# Altium PCB ongeki2.0_2021-10-12.pcbdoc
Units mil, origin at the board's own origin, x right, y up, seen from the top; angles counter-clockwise.
Board outline 4159.61 x 3372.2 mil, 2 copper layers (Top Layer, Bottom Layer); 1 components, 2 nets, 83 pads, 0 vias.
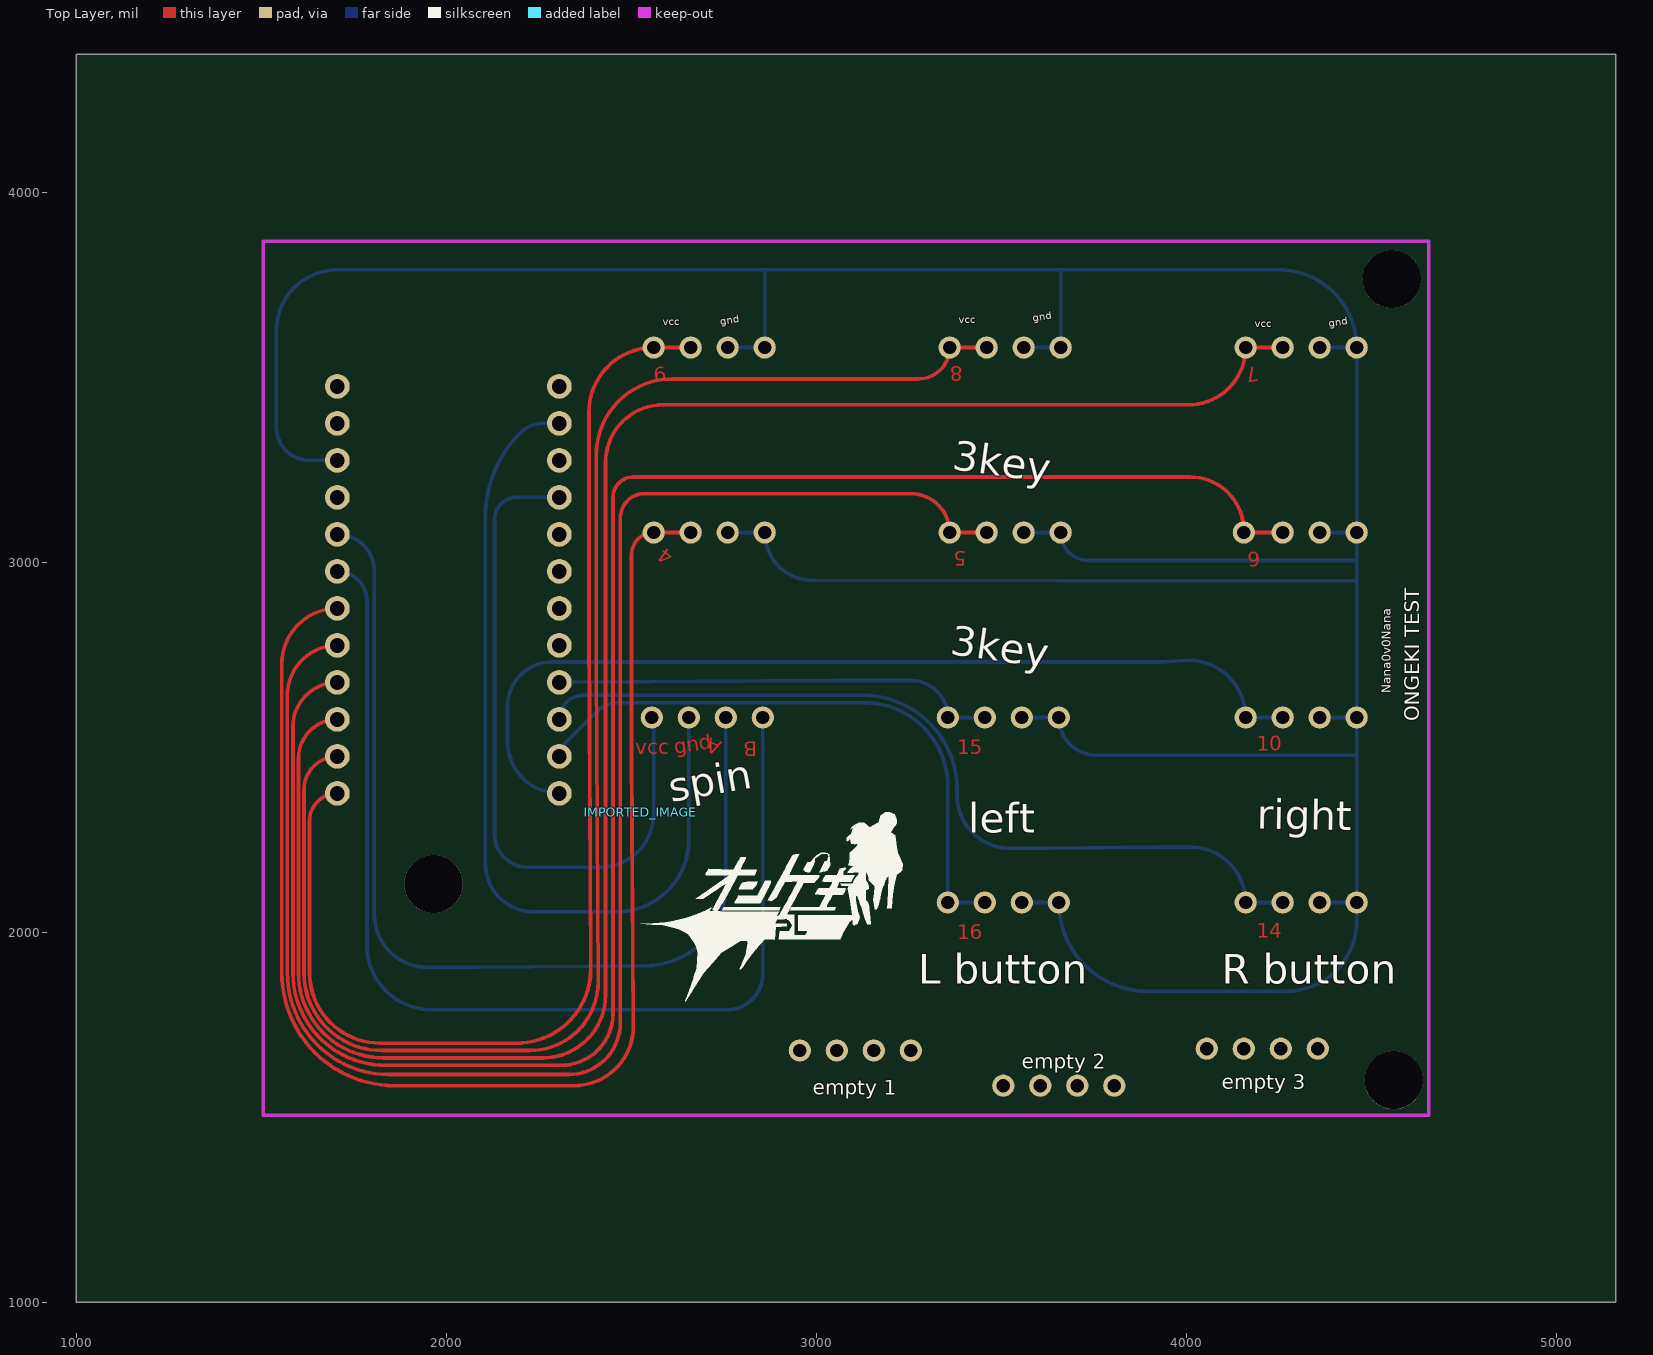
[diagram p0: Top Layer view]
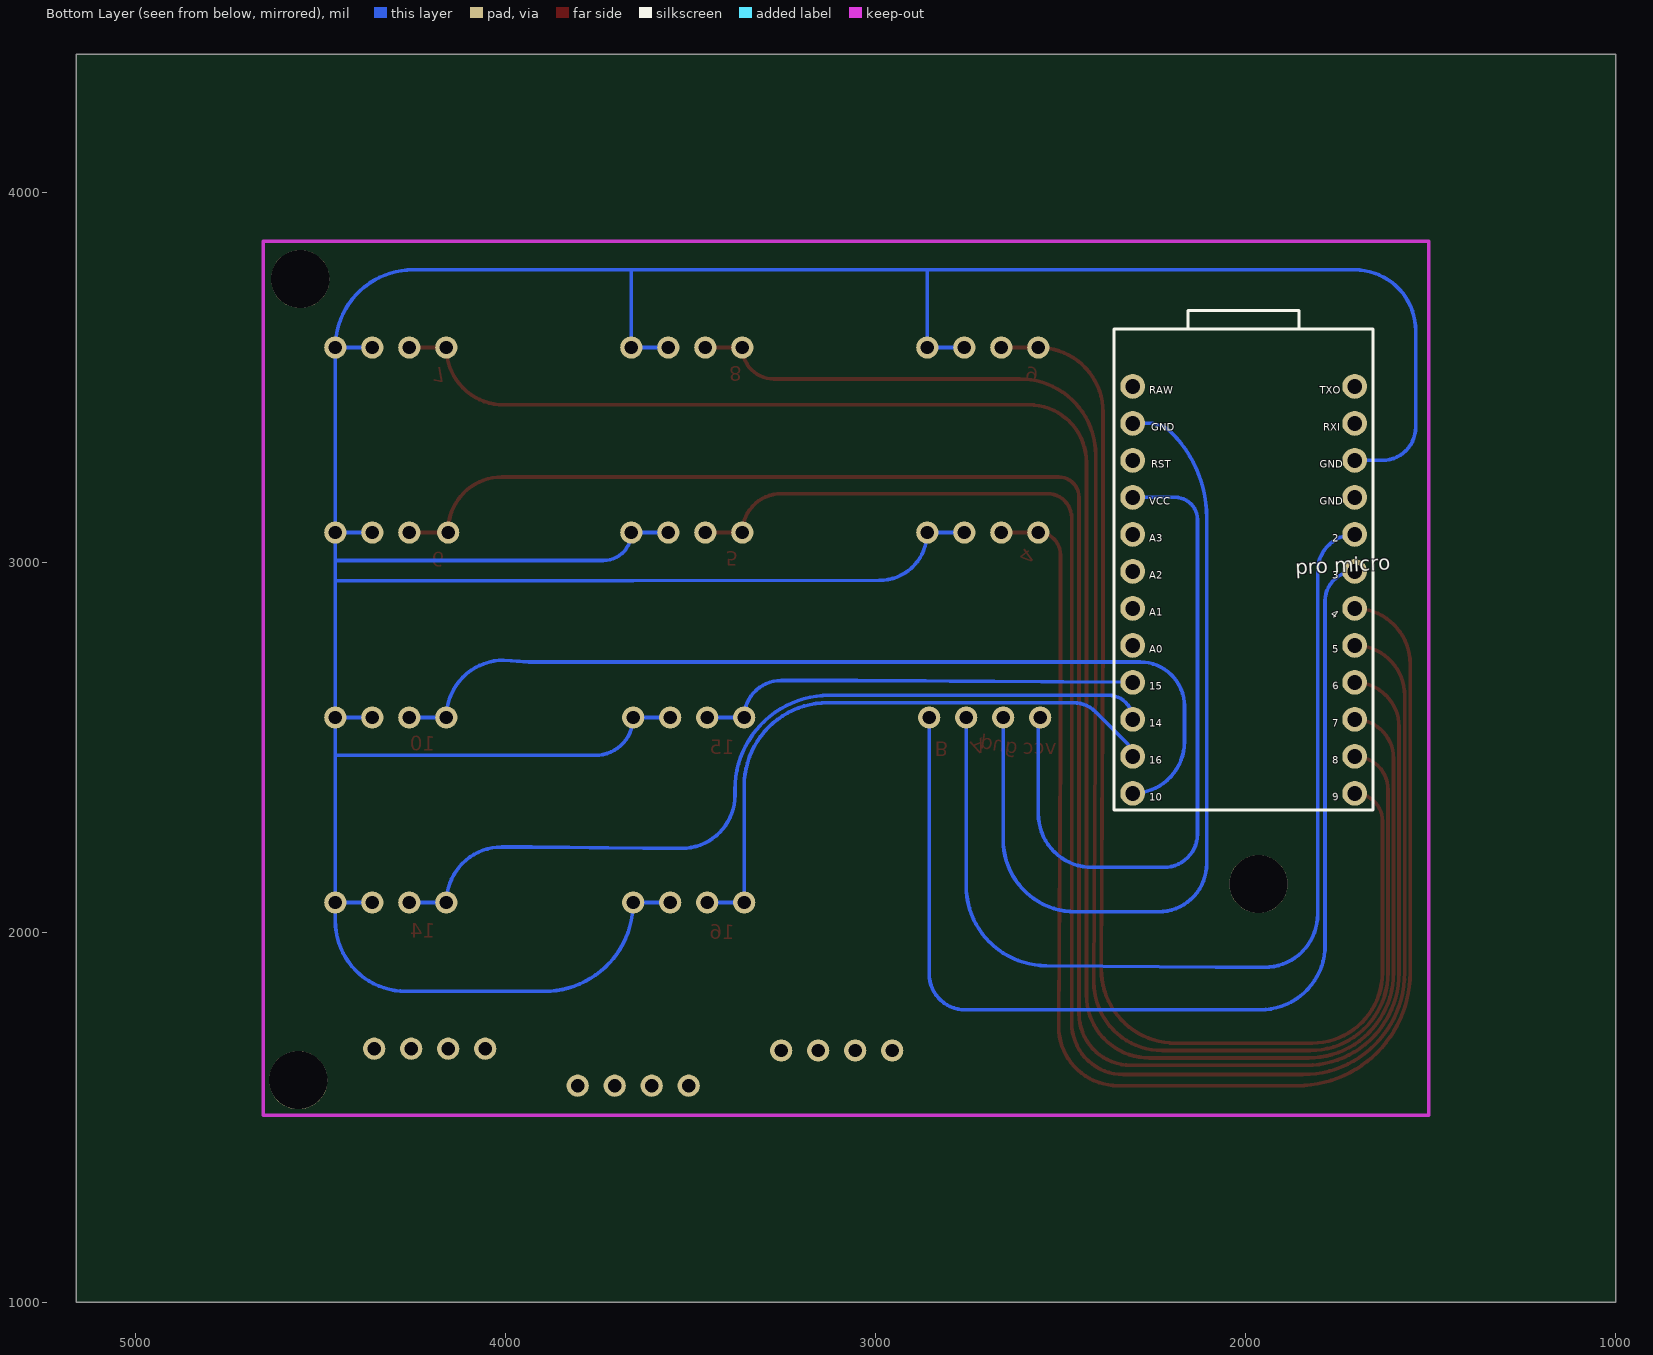
[diagram p1: Bottom Layer view, seen from below]

## Layer stack, top to bottom
Top Layer: signal copper (thickness not stored)
Dielectric: dielectric 12.6, FR-4, Dk 4.8
Bottom Layer: signal copper (thickness not stored)

## Board outline
5159.61,1000 1000,1000 1000,4372.2 5159.61,4372.2

## Components (designator, comment, footprint, x,y, rotation, side; value= is the part's Value field where it differs from the comment)
IMPORTED_IMAGE "IMPORTED_IMAGE" IMPORTED_IMAGE 2524.6,2324.54 r0 top

## Footprints (in the part's own frame and the unit in brackets; to place one, negate y for a bottom-side part, rotate by r counter-clockwise, add the part's x,y. Pads: shape width x height; smd on the part's side, far side on the other; paste and mask are expansions set on the pad)
IMPORTED_IMAGE [mil]
  silkscreen extent 0,-512 709,0

## Free pads (board coordinates)
  round 66.93 hole 40: 1(1705,2375.2) 2(1705,2475.2) 3(1705,2575.2) 4(1705,2675.2) 5(1705,2775.2) 6(1705,2875.2) 7(1705,2975.2) 8(1705,3075.2) 9(1705,3175.2) 10(1705,3275.2) 11(1705,3375.2) 12(1705,3475.2) 13(2305,3475.2) 14(2305,3375.2) 15(2305,3275.2) 16(2305,3175.2) 17(2305,3075.2) 18(2305,2975.2) 19(2305,2875.2) 20(2305,2775.2) 21(2305,2675.2) 22(2305,2575.2) 23(2305,2475.2) 24(2305,2375.2)
  round 60 hole 36: 25(2560,3080.2) 25(2560,3580.2) 25(3355,2080.2) 25(3355,2580.2) 26(2660,3080.2) 26(2660,3580.2) 26(3455,2080.2) 26(3455,2580.2) 27(2760,3080.2) 27(2760,3580.2) 27(3555,2080.2) 27(3555,2580.2) 28(2860,3080.2) 28(2860,3580.2) 28(3655,2080.2) 28(3655,2580.2) 31(2555,2580.2) 31(2955,1680.2) 31(3360,3080.2) 31(3360,3580.2) 31(3505,1585.2) 31(4055,1685.2) 32(2655,2580.2) 32(3055,1680.2) 32(3460,3080.2) 32(3460,3580.2) 32(3605,1585.2) 32(4155,1685.2) 33(2755,2580.2) 33(3155,1680.2) 33(3560,3080.2) 33(3560,3580.2) 33(3705,1585.2) 33(4255,1685.2) 34(2855,2580.2) 34(3255,1680.2) 34(3660,3080.2) 34(3660,3580.2) 34(3805,1585.2) 34(4355,1685.2) 35(4155,3080.2) 35(4160,2080.2) 35(4160,2580.2) 35(4160,3580.2) 36(4260,2080.2) 36(4260,2580.2) 36(4260,3080.2) 36(4260,3580.2) 37(4360,2080.2) 37(4360,2580.2) 37(4360,3080.2) 37(4360,3580.2) 38(4460,2080.2) 38(4460,2580.2) 38(4460,3080.2) 38(4460,3580.2)
  round 157.48 hole 157.48 unplated: ""(1965,2130.2) ""(4555,3765.2) ""(4560,1600.2)

## Nets (pads, with @x,y where several pads share a name; then routed paths per layer and width w, separated by ;. In a path a pad name is that pad's centre, name@x,y a point inside that pad or via, vN(x,y) a via of type N, cw(c..) or ccw(c..) an arc to the next point about the centre after c; other vN are vias at no path point)
S$1294: pad.1 pad.2 pad.3 pad.4 pad.5 pad.6 pad.7 pad.8 pad.10 pad.14 pad.16 pad.21 pad.22 pad.23 pad.24 pad.25 pad.26 pad.27 pad.28 pad.31 pad.32 pad.33 pad.34 pad.35 pad.36 pad.37 pad.38 | length 55355.4
  Top Layer w10: pad.8@1676.57,3075.2 pad.8 ; pad.1 ccw(c1705,2300.2) 1630,2300.2 1630,1890.2 ccw(c1820,1890.2) 1820,1700.2 2030,1700.2 2190,1700.2 ccw(c2190,1900.2) 2390,1900.2 2385,2830.2 2385,3405.2 cw(c2560,3405.2) 2560,3580.2 pad.26@2660,3580.2 ; pad.2 ccw(c1705,2385.2) 1615,2385.2 1615,1890.2 ccw(c1825,1890.2) 1825,1680.2 2030,1680.2 2225,1680.2 ccw(c2225,1865.2) 2410,1865.2 2405,2718.71 ; pad.3 ccw(c1705,2470.2) 1600,2470.2 1600,1890.2 ccw(c1830,1890.2) 1830,1660.2 2035,1660.2 2260,1660.2 ccw(c2260,1830.2) 2430,1830.2 2430,2595.2 2430,3270.2 cw(c2585,3270.2) 2585,3425.2 4005,3425.2 ccw(c4005,3580.2) 4160,3580.2 pad.36@4260,3580.2 ; pad.4 ccw(c1705,2555.2) 1585,2555.2 1585,1890.2 ccw(c1835,1890.2) 1835,1640.2 2035,1640.2 2310,1640.2 ccw(c2310,1780.2) 2450,1780.2 2450,2545.2 ; pad.5 ccw(c1705,2640.2) 1570,2640.2 1570,1890.2 ccw(c1845,1890.2) 1845,1615.2 2035,1615.2 2330,1615.2 ccw(c2330,1755.2) 2470,1755.2 2470,2525.2 2470,3120.2 cw(c2535,3120.2) 2535,3185.2 3255,3185.2 cw(c3255,3080.2) 3360,3080.2 pad.32@3460,3080.2 ; pad.6 ccw(c1705,2725.2) 1555,2725.2 1555,1890.2 ccw(c1860,1890.2) 1860,1585.2 2035,1585.2 2345,1585.2 ccw(c2345,1745.2) 2505,1745.2 2500,2492.7 ; 2405,2710.2 2405,3290.2 cw(c2610,3290.2) 2610,3495.2 3275,3495.2 ccw(c3275,3580.2) 3360,3580.2 pad.32@3460,3580.2 ; 2450,2547.7 2450,3172.7 ; 2450,3175.2 cw(c2505,3175.2) 2505,3230.2 4010,3230.2 cw(c4010,3085.2) 4155,3085.2 4155,3080.2 pad.36@4260,3080.2 ; 2500,2485.2 2500,3020.2 cw(c2560,3020.2) 2560,3080.2 pad.26@2660,3080.2
  Bottom Layer w10: pad.7 cw(c1705,2895.2) 1785,2895.2 1785,2636.47 1785,1950.2 ; pad.8 cw(c1705,2975.2) 1805,2975.2 1805,2838.9 1805,2040.2 ; pad.10 1630,3275.2 cw(c1630,3365.2) 1540,3365.2 1540,3625.2 cw(c1705,3625.2) 1705,3790.2 2860,3790.2 ; 1785,1964.81 ccw(c1959.62,1964.81) 1959.62,1790.2 1995.42,1790.2 ; 1805,2048.31 ccw(c1948.12,2048.31) 1948.12,1905.2 2080,1905.2 2538.53,1909.62 ccw(c2538.53,2126.09) 2755,2126.09 ; 1965,1790.2 2750,1790.2 2757.5,1790.2 ccw(c2757.5,1887.7) 2855,1887.7 pad.34@2855,2572.7 ; 2105,2185.02 ccw(c2234.82,2185.02) 2234.82,2055.2 2460,2055.2 ccw(c2460,2250.2) 2655,2250.2 pad.32@2655,2580.2 ; 2105,2185.2 2105,2566.97 2105,2775.2 2105,3120.85 cw(c2429.35,3120.85) 2200,3350.2 cw(c2260.36,3289.84) 2260.36,3375.2 pad.14 ; 2130,2335.2 2130,3030.34 2130,3115.2 cw(c2190,3115.2) 2190,3175.2 pad.16 pad.16@2311.05,3169.15 ; 2130,2341.02 2130,2265.2 ccw(c2220,2265.2) 2220,2175.2 2415,2175.2 ccw(c2415,2320.2) 2560,2320.2 2560,2568.13 ccw(c2542.93,2568.13) pad.31@2555,2580.2 ; 2165,2610.2 cw(c2285,2610.2) 2285,2730.2 3095,2730.2 ; 2165,2615.2 2165,2515.2 ccw(c2305,2515.2) pad.24 ; pad.23 cw(c2353.28,2475.2) 2319.14,2509.34 2400,2590.2 2405.25,2595.45 cw(c2465,2535.7) 2465,2620.2 3135,2620.2 ; pad.22 cw(c2370,2575.2) 2370,2640.2 2405,2640.2 3125,2640.2 cw(c3125,2385.2) 3380,2385.2 3380,2370.2 ccw(c3523.54,2370.2) 3523.54,2226.66 3627.65,2226.66 ; pad.21 3050,2680.2 3255,2680.2 cw(c3255,2580.2) 3355,2580.2 pad.26@3455,2580.2 ; 2755,2116.2 2755,2519 pad.33@2755,2580.2 ; pad.27@2760,3080.2 pad.28@2860,3080.2 ; pad.27@2760,3580.2 2860,3580.2 2860,3790.2 ; pad.34@2845,2570.2 cw(c2855,2570.2) pad.34@2855,2580.2 ; pad.28@2860.67,3079.52 ccw(c2989.33,3079.52) 2989.33,2950.87 3656.34,2950.2 ; 3097.5,2730.2 3302.5,2730.2 3937.5,2730.2 4005,2735.2 cw(c4005,2580.2) 4160,2580.2 pad.36@4260,2580.2 ; 3129.61,2620.2 cw(c3129.61,2394.81) 3355,2394.81 3355,2080.2 pad.26@3455,2080.2 ; pad.27@3540,2080.2 pad.28@3640,2080.2 ; pad.27@3550,2580.2 pad.28@3650,2580.2 ; pad.33@3560,3080.2 pad.34@3660,3080.2 ; pad.33@3560,3580.2 3660,3580.2 3660,3790.2 ; 3616.63,2226.53 3930,2230.2 4010,2230.2 cw(c4010,2080.2) 4160,2080.2 pad.36@4260,2080.2 ; pad.28@3655,2080.2 ccw(c3895,2080.2) 3895,1840.2 4270,1840.2 ccw(c4270,2030.2) 4460,2030.2 pad.38@4460,2080.2 ; pad.28@3655,2580.2 ccw(c3757.19,2580.2) 3757.19,2478.01 4460,2478.01 ; 3655,2950.2 4456.47,2950.2 ; pad.34@3655,3075.2 cw(c3660,3075.2) pad.34@3660,3080.2 ; 3735.87,3004.32 4460,3004.32 ; 3735.87,3004.33 cw(c3735.87,3080.2) pad.34@3660,3080.2 ; pad.37@4360,2080.2 pad.38@4460,2080.2 ; pad.37@4360,2580.2 pad.38@4460,2580.2 ; pad.37@4360,3080.2 pad.38@4460,3080.2 ; pad.37@4360,3580.2 pad.38@4460,3580.2 ; pad.38@4455,2075.2 cw(c4460,2075.2) pad.38@4460,2080.2 ; 2860,3790.2 3660,3790.2 ; 3660,3790.2 4250,3790.2 cw(c4250,3580.2) pad.38@4460,3580.2 ; pad.38@4460,2080.2 pad.38@4460,2580.2 ; pad.38@4460,2580.2 pad.38@4460,3080.2 ; pad.38@4460,3080.2 pad.38@4460,3580.2
S$2363: pad.9

## Other copper
Top Layer:
  text "9" at 2593.28,3529.81 h39.37 r185
  text "8" at 3395,3529.88 h39.37 r180
  text "7" at 4191.24,3529.52 h39.37 r191
  text "5" at 3405,3029.88 h39.37 r180
  text "6" at 4198.28,3029.81 h39.37 r185
  text "4" at 2616.57,3021.12 h39.37 r144
  text "B" at 2840,2514.88 h39.37 r180
  text "A" at 2747.05,2513.57 h39.37 r159
  text "10" at 4190,2490.51 h39.37
  text "vcc" at 2510,2480.51 h39.37
  text "gnd" at 2618.08,2480.75 h39.37 r9
  text "15" at 3380,2480.51 h39.37
  text "14" at 4190,1985.51 h39.37
  text "16" at 3380,1980.51 h39.37

## Silkscreen, mask and mechanical layers (free items; w line width, h text height)
Top Overlay:
  text "gnd" at 3586.54,3650.48 h19.68 r9
  text "vcc" at 3385,3645.35 h19.68
  text "vcc" at 2585,3640.35 h19.68
  text "gnd" at 2741.54,3640.48 h19.68 r9
  text "vcc" at 4185,3635.35 h19.68
  text "gnd" at 4386.54,3635.48 h19.68 r9
  text "3key" at 3364.43,3250.59 h80 r352
  text "3key" at 3359.43,2750.59 h80 r352
  text "Nana0v0Nana" at 4551.81,2645.2 h23.62 r90
  text "ONGEKI TEST" at 4629.69,2570.2 h39.37 r90
  text "spin" at 2606.95,2350.8 h80 r10
  text "right" at 4189.3,2280.2 h80 r359
  text "left" at 3410,2269.3 h80
  text "L button" at 3275,1860.2 h80
  text "R button" at 4095,1860.2 h80
  text "empty 2" at 3555,1630.51 h39.37
  text "empty 3" at 4095,1575.51 h39.37
  text "empty 1" at 2990,1560.51 h39.37
Bottom Overlay:
  lines w8: 1655,2330.2 2355,2330.2 ; 1655,2330.2 1655,3630.2 ; 1655,2330.2 2355,2330.2 ; 1655,2330.2 1655,3630.2 ; 1655,3630.2 2355,3630.2 ; 1655,3630.2 2355,3630.2 ; 1855,3680.2 2155,3680.2 ; 1855,3680.2 2155,3680.2 ; 1855,3680.2 1855,3630.2 1855,3680.2 ; 2155,3680.2 2155,3630.2 2155,3680.2 ; 2355,2330.2 2355,3630.2 ; 2355,2330.2 2355,3630.2
  text "TXO" at 1800,3455.35 h19.68
  text "RAW" at 2260,3455.35 h19.68
  text "RXI" at 1790,3355.35 h19.68
  text "GND" at 2255,3355.35 h19.68
  text "GND" at 1800,3255.35 h19.68
  text "RST" at 2255,3255.35 h19.68
  text "GND" at 1800,3155.35 h19.68
  text "VCC" at 2260,3155.35 h19.68
  text "2" at 1765,3055.35 h19.68
  text "A3" at 2260,3055.35 h19.68
  text "pro micro" at 1863.97,2965.54 h39.37 r357
  text "3" at 1765,2955.35 h19.68
  text "A2" at 2260,2955.35 h19.68
  text "4" at 1770.65,2857.13 h19.68 r35
  text "A1" at 2260,2855.35 h19.68
  text "5" at 1765,2755.35 h19.68
  text "A0" at 2260,2755.35 h19.68
  text "6" at 1764.14,2655.39 h19.68 r355
  text "15" at 2260,2655.35 h19.68
  text "7" at 1765,2555.35 h19.68
  text "14" at 2260,2555.35 h19.68
  text "8" at 1765,2455.35 h19.68
  text "16" at 2260,2455.35 h19.68
  text "9" at 1764.14,2355.39 h19.68 r355
  text "10" at 2260,2355.35 h19.68
Document:
  lines w0.1: 3078.8,2685.1 3080.8,2687.1